# Altium PCB layout.PcbDoc (part 1 of 3)
Units mm, origin at the board's own origin, x right, y up, seen from the top; angles counter-clockwise.
Board outline 100.08 x 22.99 mm, 2 copper layers (Top Layer, Bottom Layer); 117 components, 109 nets, 394 pads, 168 vias.
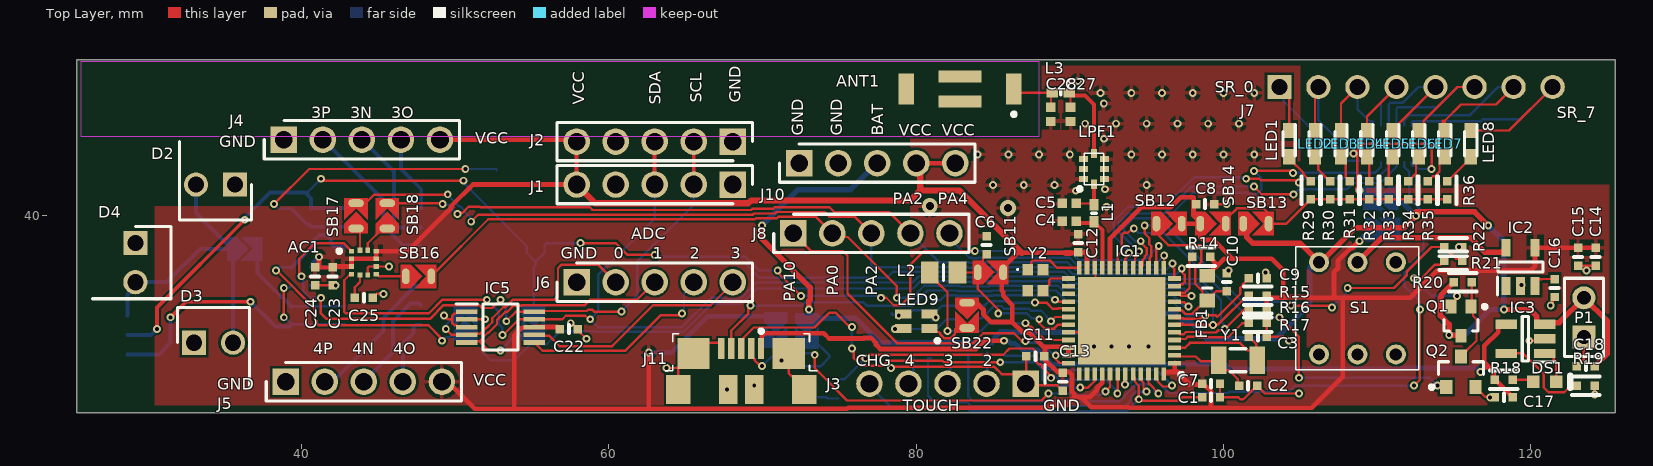
[diagram p0: Top Layer view]
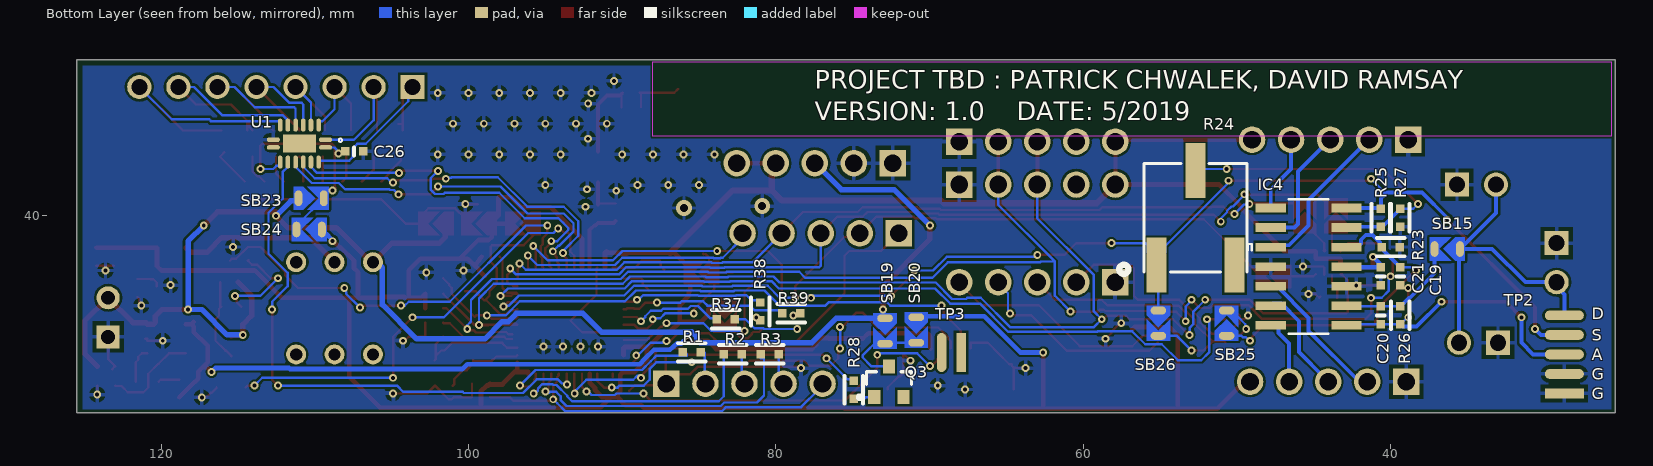
[diagram p1: Bottom Layer view, seen from below]
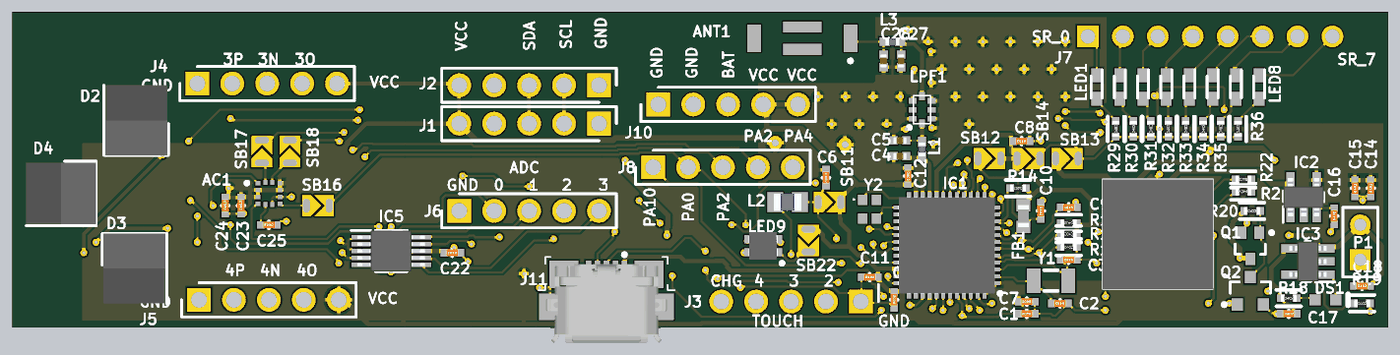
[diagram p3: 3D render of the assembled board from above, using the file's embedded part models]
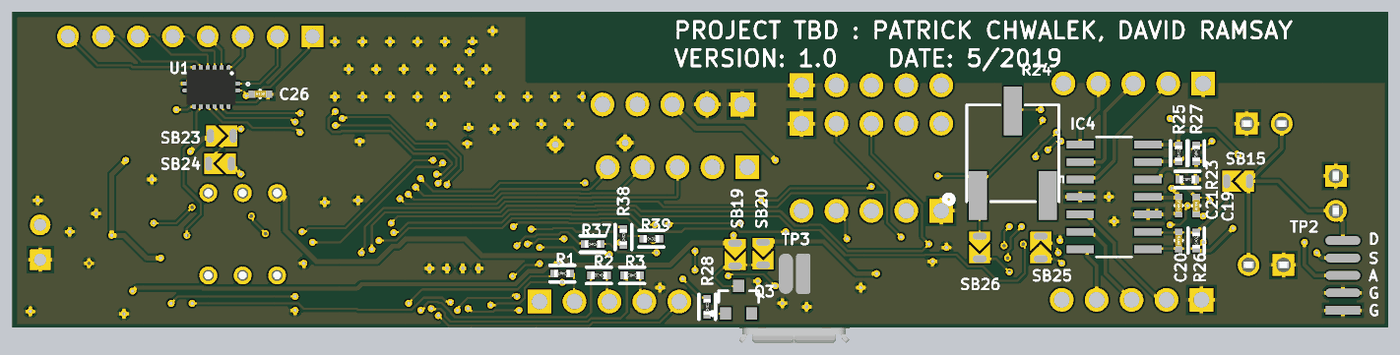
[diagram p4: 3D render of the assembled board from below, using the file's embedded part models]

## Layer stack, top to bottom
Top Solder: solder mask 0.0102, Solder Resist, Dk 3.5
Top Layer: signal copper 0.0356
Dielectric 1: dielectric 0.32, FR-4, Dk 4.8
Bottom Layer: signal copper 0.0356
Bottom Solder: solder mask 0.0102, Solder Resist, Dk 3.5

## Board outline
25.4,27.178 125.476,27.178 125.476,50.165 25.4,50.165

## Design rules (kind name [scope] priority, off if disabled: settings)
Clearance [All] p1: gap=0.152 ignorepadtopadclearanceinfootprint=FALSE
MinimumSolderMaskSliver [All] p1: minsoldermaskwidth=0.102
PolygonConnect [All] p1: connectstyle=Relief reliefconductorwidth=0.254 reliefentries=4 polygonreliefangle="90 Angle" airgapwidth=0.254
RoutingVias [All] p1: holewidth=0.254 width=0.508 viastyle="Through Hole" minholewidth=0.254 minwidth=0.508 maxholewidth=0.254 maxwidth=0.508
SilkToSilkClearance [All] p1: silktosilkclearance=0
SilkToSolderMaskClearance [IsPad] p1: minsilkscreentomaskgap=0 clearancetoexposedcopper=TRUE
SolderMaskExpansion [All] p1: expansion=0.102
Width RF [InNet('RF_OUT')] p1: maxlimit=0.254 minlimit=0.254 preferedwidth=0.254
Width VBAT [InNet('BAT_OUT')] p2: maxlimit=0.356 minlimit=0.254 preferedwidth=0.356 minimp=50.000000 maximp=50.000000 favimp=50.000000
Width VBAT_1 [InNet('BAT_SW')] p3: maxlimit=0.356 minlimit=0.254 preferedwidth=0.356 minimp=50.000000 maximp=50.000000 favimp=50.000000
Width 3.3V [InNet('VCC')] p4: maxlimit=0.457 minlimit=0.203 preferedwidth=0.305 minimp=50.000000 maximp=50.000000 favimp=50.000000
Width 5V [InNet('5V')] p5: maxlimit=0.305 minlimit=0.203 preferedwidth=0.305 minimp=50.000000 maximp=50.000000 favimp=50.000000
Width [All] p6: maxlimit=0.254 minlimit=0.152 preferedwidth=0.152 minimp=50.000000 maximp=50.000000 favimp=50.000000
27 further rules are at their usual default settings.

## Classes and differential pairs
component class Sheet1_ui: C26 LED1 LED2 LED3 LED4 LED5 LED6 LED7 LED8 LED9 Q3 R28 R29 R30 R31 R32 R33 R34 R35 R36 R37 R38 R39 SB19 SB20 SB22 SB23 SB24 TP3 U1
component class Sheet1_sensors: AC1 C19 C20 C21 C22 C23 C24 C25 D2 D3 D4 IC4 IC5 R23 R24 R25 R26 R27 SB15 SB16 SB17 SB18 SB25 SB26 TP2
component class Sheet1_pwr: C14 C15 C16 C17 C18 DS1 IC2 IC3 P1 Q1 Q2 R18 R19 R20 R21 R22 S1 SB13 SB14
component class Sheet1_mcu: ANT1 C2 C3 C4 C5 C6 C7 C8 C9 C10 C11 C12 C13 C27 C28 FB1 IC1 J11 L1 L2 L3 LPF1 R14 R15 R16 R17 SB11 SB12 Y1 Y2
component class Sheet1_headers: C1 J1 J2 J3 J4 J5 J6 J7 J8 J10 R1 R2 R3

## Components (designator, comment, footprint, x,y, rotation, side; value= is the part's Value field where it differs from the comment)
AC1 "LSM303CTR" PQFN50P200X200X100-12N 44.069,36.957 r0 top
ANT1 "2450AT43B100E" 2450AT43B100E 82.86,48.26 r0 top
C1 "0.1µF" SMD-0402C 99.187,28.194 r90 top
C2 "15pF" SMD-0402C 101.6,28.956 r90 top
C3 "15pF" SMD-0402C 102.235,32.131 r90 top
C4 "GRM1555C1HR80BA01D" CAPC1005X55N 89.964,39.666 r0 top
C5 "GRM1555C1HR30WA01D" CAPC1005X55N 89.964,40.809 r0 top
C6 "4.7µF" SMD-0402C 84.582,38.1 r180 top
C7 "0.10µF" SMD-0402C 99.187,29.083 r90 top
C8 "0.10µF" SMD-0402C 98.806,40.767 r90 top
C9 "0.10µF" SMD-0402C 102.235,35.941 r90 top
C10 "0.10µF" SMD-0402C 100.203,35.687 r180 top
C11 "0.10µF" SMD-0402C 87.757,30.861 r270 top
C12 "0.10µF" SMD-0402C 90.551,38.227 r180 top
C13 "100pF" SMD-0402C 89.535,29.21 r0 top
C14 "1µF" SMD-0402C 124.206,37.338 r0 top
C15 "10µF" SMD-0402C 123.063,37.338 r0 top
C16 "0.10µF" SMD-0402C 121.539,35.306 r0 top
C17 "4.7µF" SMD-0402C 118.237,28.194 r270 top
C18 "4.7µF" SMD-0402C 123.571,30.226 r270 top
C19 "10000pF" SMD-0402C 39.37,36.068 r0 bottom
C20 "5pF" SMD-0402C 40.64,33.528 r0 bottom
C21 "0.10µF" SMD-0402C 40.64,36.068 r180 bottom
C22 "0.10µF" SMD-0402C 57.404,32.639 r90 top
C23 "10µF" SMD-0402C 42.037,36.068 r0 top
C24 "0.10µF" SMD-0402C 40.894,36.068 r0 top
C25 "0.10µF" SMD-0402C 44.069,34.671 r90 top
C26 "1µF" SMD-0402C 107.442,44.196 r270 bottom
C27 "GRM1555C1HR80BA01D" CAPC1005X55N 90.043,46.609 r90 top
C28 "GRM1555C1HR30WA01D" CAPC1005X55N 88.773,46.609 r90 top
D2 "BPV22NF" TO254P510X450X920-2P 35.687,42.037 r180 top
D3 "BPV22NF" TO254P510X450X920-2P 33.02,31.75 r0 top
D4 "BPV22NF" TO254P510X450X920-2P 29.21,38.227 r270 top
DS1 "LTST-C190KFKT" LTST-C190KFKT_V 120.904,29.21 r0 top
FB1 "FCM1608KF-601T03" BEADC1608X95N 98.933,35.306 r90 top
IC1 "STM32WB55CGU6" QFN50P700X700X65-49N-D 93.366,33.175 r180 top
IC2 "LK112M33TR" SOT95P280X145-5N 119.319,36.683 r90 top
IC3 "MCP73831T-2DCI_OT" SOT95P270X145-5N 119.634,32.004 r180 top
IC4 "LM2902PWRG3" SOIC127P600X175-14N 45.339,36.703 r0 bottom
IC5 "ADS1015IDGST" SOP50P490X110-10N 52.959,32.766 r0 top
J1 "22-28-4050" HDRV5W66P0X254_1X5_1270X249X838P 68.072,42.037 r180 top
J2 "22-28-4050" HDRV5W66P0X254_1X5_1270X249X838P 68.072,44.831 r180 top
J3 "22-28-4050" HDRV5W66P0X254_1X5_1270X249X838P 87.122,29.083 r180 top
J4 "22-28-4050" HDRV5W66P0X254_1X5_1270X249X838P 38.862,44.958 r0 top
J5 "22-28-4050" HDRV5W66P0X254_1X5_1270X249X838P 38.989,29.21 r0 top
J6 "22-28-4050" HDRV5W66P0X254_1X5_1270X249X838P 57.912,35.687 r0 top
J7 "22-28-4083" HDRV8W87P0X254_1X8_2032X249X863P 103.632,48.387 r0 top
J8 "22-28-4050" HDRV5W66P0X254_1X5_1270X249X838P 72.009,38.862 r0 top
J10 "22-28-4050" HDRV5W66P0X254_1X5_1270X249X838P 72.39,43.434 r0 top
J11 "ZX62R-B-5P" HIRO-ZX62R-B-5P_V 68.619,30.04 r0 top
L1 "LQG15HS2N7S02D" INDC1005X55N 91.567,40.174 r90 top
L2 "LBR2012T100K" INDC2012X145N 81.788,36.322 r0 top
L3 "LQG15HS2N7S02D" INDC1005X55N 89.408,48.006 r180 top
LED1 "150060VS55040" LEDM168X50N 104.267,44.704 r270 top
LED2 "150060VS55040" LEDM168X50N 105.954,44.704 r270 top
LED3 "150060VS55040" LEDM168X50N 107.642,44.704 r270 top
LED4 "150060VS55040" LEDM168X50N 109.329,44.704 r270 top
LED5 "150060VS55040" LEDM168X50N 111.016,44.704 r270 top
LED6 "150060VS55040" LEDM168X50N 112.703,44.704 r270 top
LED7 "150060VS55040" LEDM168X50N 114.391,44.704 r270 top
LED8 "150060VS55040" LEDM168X50N 116.078,44.704 r270 top
LED9 "CLMVC-FKC-CGJJM569aBB7a343" SON95P200X200X100-4N 80.01,33.147 r180 top
LPF1 "LFL212G45TC1A007" LFL212G45TC1A007 91.567,43.053 r90 top
P1 "Header 2" HDR1X2 123.444,32.131 r90 top
Q1 "NTS4101PT1G" ONSC-SOT-323-3-419-04_V 115.443,33.147 r270 top
Q2 "BSS138LT3G" ONSC-SOT-23-3-318-08_V 115.443,29.861 r90 top
Q3 "MMBT3904LT1G" ONSC-SOT-23-3-318-08_V 72.644,29.21 r90 bottom
R1 "1k" SMD-0402-RES 85.471,31.115 r90 bottom
R2 "1k" SMD-0402-RES 82.804,30.988 r90 bottom
R3 "1k" SMD-0402-RES 80.391,30.988 r90 bottom
R14 "10k" SMD-0402-RES 98.552,37.338 r90 top
R15 "10k" SMD-0402-RES 102.235,33.99 r90 top
R16 "10k" SMD-0402-RES 102.235,34.798 r90 top
R17 "10K" SMD-0402-RES 102.235,33.043 r270 top
R18 "80.6k" SMD-0402-RES 118.237,29.337 r270 top
R19 "20k" SMD-0402-RES 123.571,28.956 r270 top
R20 "1M" SMD-0402-RES 115.57,35.687 r270 top
R21 "10k" SMD-0402-RES 114.935,37.084 r90 top
R22 "32.4k" SMD-0402-RES 114.935,37.973 r90 top
R23 "47k" SMD-0402-RES 40.005,37.973 r90 bottom
R24 "3361P-1-104GLF" 3361P_1 52.705,39.878 r180 bottom
R25 "47k" SMD-0402-RES 40.64,39.878 r180 bottom
R26 "100k" SMD-0402-RES 39.37,33.528 r180 bottom
R27 "3.3k" SMD-0402-RES 39.37,39.878 r0 bottom
R28 "1k" SMD-0402-RES 74.93,28.702 r180 bottom
R29 "150" SMD-0402-RES 105.664,41.656 r0 top
R30 "150" SMD-0402-RES 106.934,41.656 r0 top
R31 "150" SMD-0402-RES 108.204,41.656 r0 top
R32 "150" SMD-0402-RES 109.474,41.656 r0 top
R33 "150" SMD-0402-RES 110.744,41.656 r0 top
R34 "150" SMD-0402-RES 112.014,41.656 r0 top
R35 "150" SMD-0402-RES 113.284,41.656 r0 top
R36 "150" SMD-0402-RES 114.554,41.656 r0 top
R37 "100" SMD-0402-RES 83.261,33.274 r270 bottom
R38 "22" SMD-0402-RES 81.026,33.782 r180 bottom
R39 "22" SMD-0402-RES 78.994,33.655 r270 bottom
S1 "MHPS2285" MHPS2285 111.212,36.988 r180 top
SB11 "SOLDER_JUMPER" JUMPER_SMD 85.09,36.322 r0 top
SB12 "SOLDER_JUMPER" JUMPER_SMD 96.71,39.497 r0 top
SB13 "SOLDER_JUMPER" JUMPER_SMD 102.362,39.497 r0 top
SB14 "SOLDER_JUMPER" JUMPER_SMD 99.568,39.497 r0 top
SB15 "SOLDER_JUMPER" JUMPER_SMD 36.576,37.846 r0 bottom
SB16 "SOLDER_JUMPER" JUMPER_SMD 47.879,36.068 r0 top
SB17 "SOLDER_JUMPER" JUMPER_SMD 43.561,40.259 r90 top
SB18 "SOLDER_JUMPER" JUMPER_SMD 45.593,40.259 r90 top
SB19 "SOLDER_JUMPER" JUMPER_SMD 72.898,32.258 r270 bottom
SB20 "SOLDER_JUMPER" JUMPER_SMD 70.866,32.322 r270 bottom
SB22 "SOLDER_JUMPER" JUMPER_SMD 83.312,33.274 r270 top
SB23 "SOLDER_JUMPER" JUMPER_SMD 109.982,41.148 r180 bottom
SB24 "SOLDER_JUMPER" JUMPER_SMD 110.617,39.116 r0 bottom
SB25 "SOLDER_JUMPER" JUMPER_SMD 50.673,33.274 r90 bottom
SB26 "SOLDER_JUMPER" JUMPER_SMD 55.118,32.766 r270 bottom
TP2 "TEST_PT" "Edge Connector (5)" 28.702,28.448 r90 bottom
TP3 "2_pin_pad" "Edge Connector (2-mini)" 67.945,31.115 r0 bottom
U1 "74HC595BQ,115" QFN50P250X350X100-17N 110.998,44.704 r0 bottom
Y1 "NX3215SA-32.768K-STD-MUA-8" NX3215SA 100.945,30.607 r0 top
Y2 "XRCGB32M000F1H01R0" XRCGB32M000F1H01R0 87.757,35.814 r270 top

## Footprints (in the part's own frame and the unit in brackets; to place one, negate y for a bottom-side part, rotate by r counter-clockwise, add the part's x,y. Pads: shape width x height; smd on the part's side, far side on the other; paste and mask are expansions set on the pad)
2450AT43B100E [mm]
  rect 1x2 smd mask+0.102: 1(3.5,0) 2(-3.5,0)
  rect 2.8x0.8 smd mask+0.102: 3(0,0.815) 4(0,-0.815)
  silkscreen extent 3.4,-1.75 3.6,-1.55
3361P_1 [mm]
  rect 1.31x3.55 smd: 1(-2.54,-3.075) 2(0,3.075) 3(2.54,-3.075)
  silkscreen extent -4.96,-3.65 3.35,3.52
BEADC1608X95N [mm]
  rect 0.9x1 smd: 1(-0.8,0) 2(0.8,0)
  silkscreen extent 0,-0.3 0,0.3, body extent -0.8,-0.4 0.8,0.4, height 0.95
CAPC1005X55N [mm]
  rect 0.6x0.62 smd: 1(-0.46,0) 2(0.46,0)
  body extent -0.5,-0.25 0.5,0.25, height 0.55
"Edge Connector (2-mini)" [mm]
  rect 0.635x2.54 smd paste+0.2: 1(0,0)
  oval 0.635x2.54 smd paste+0.2: 2(1.27,0)
"Edge Connector (5)" [mm]
  rect 0.635x2.54 smd: 1(0,0)
  oval 0.635x2.54 smd: 2(1.27,0) 3(2.54,0) 4(3.81,0) 5(5.08,0)
HDR1X2 [mm] "Connector; Header; 2 Position"
  rect 1.5x1.5 hole 0.9: 1(0,0)
  round 1.5 hole 0.9: 2(2.54,0)
  silkscreen extent -1.27,-1.27 3.81,1.27
HDRV5W66P0X254_1X5_1270X249X838P [mm]
  rect 1.725x1.725 hole 1.15: 1(0,0)
  round 1.725 hole 1.15: 2(2.54,0) 3(5.08,0) 4(7.62,0) 5(10.16,0)
  silkscreen extent -1.27,-1.25 11.43,1.25
HDRV8W87P0X254_1X8_2032X249X863P [mm]
  rect 1.575x1.575 hole 1.05: 1(0,0)
  round 1.575 hole 1.05: 2(2.54,0) 3(5.08,0) 4(7.62,0) 5(10.16,0) 6(12.7,0) 7(15.24,0) 8(17.78,0)
HIRO-ZX62R-B-5P_V [mm] "USB Micro-B R/A Connector"
  rect 0.4x1.35 smd: 1(1.3,1.338) 2(0.65,1.338) 3(0,1.338) 4(-0.65,1.338) 5(-1.3,1.338)
  rect 2.1x2 smd: 6(-3.1,1.013) 11(3.1,1.013)
  rect 1.6x1.9 smd: 7(-4.1,-1.338) 10(4.1,-1.338)
  rect 1.2x1.9 smd: 8(-0.85,-1.338) 9(0.85,-1.338)
  silkscreen extent -4.95,-0.13 4.95,2.58, body extent -4.4,-3.95 4.4,1.78, height 2.71
INDC1005X55N [mm]
  rect 0.75x0.6 smd: 1(-0.55,0) 2(0.55,0)
  silkscreen extent 0,-0.15 0,0.15, body extent -0.5,-0.25 0.5,0.25, height 0.55
INDC2012X145N [mm]
  rect 1.15x1.45 smd: 1(-0.9,0) 2(0.9,0)
  silkscreen extent 0,-0.53 0,0.53, body extent -1,-0.63 1,0.63, height 1.45
JUMPER_SMD [mil]
  oval 20x40 smd paste+0 mask+0: 1(-42.5,0) 2(22.5,0)
  Top Layer region: -55,30 -55,-30 -30,-30 0,0 -30,30
  Top Layer region: -20,30 10,0 -20,-30 35,-30 35,30
LEDM168X50N [mm]
  rect 1x0.8 smd: 1(-0.85,0) 2(0.85,0)
  silkscreen extent -1.25,-0.4 0.8,0.4
LFL212G45TC1A007 [mm]
  rect 0.4x0.6 smd: 1(-0.65,0.685) 2(0,0.685) 3(0.65,0.685) 5(0.65,-0.685) 6(0,-0.685) 7(-0.65,-0.685)
  rect 0.6x0.4 smd: 4(1,0) 8(-1,0)
  silkscreen extent -1.42,-0.64 1.02,1.05
LTST-C190KFKT_V [mm] "SMD, 2-Leads, Body 1.6x0.8mm"
  rect 0.8x0.8 smd: 1(-0.75,0) 2(0.75,0)
  silkscreen extent 1.65,-0.4 1.65,0.4, body extent -0.8,-0.4 0.8,0.4, height 0.9
MHPS2285 [mm]
  round 1.3 hole 0.8: 1(0,0) 2(2.5,0) 3(5,0) 4(5,6) 5(2.5,6) 6(0,6)
  silkscreen extent -1.5,-1 6.5,7, body extent -1.5,-1 6.5,7, height 13.5
NX3215SA [mm]
  rect 1x1.8 smd: 1(-1.25,0) 2(1.25,0)
  silkscreen extent -0.5,-0.75 0.5,0.75
ONSC-SOT-23-3-318-08_V [mm] "SOT23, 3-Leads, Body 2.92x1.3mm, Pitch 0.95mm"
  rect 0.9x0.8 smd: 1(-1,0.95) 2(-1,-0.95) 3(1,0)
  silkscreen extent -1.12,-1.46 0.65,2.02, body extent -0.65,-1.46 0.65,1.46, height 1.11
ONSC-SOT-323-3-419-04_V [mm] "SOT23, 3-Leads, Body 2x1.25mm, Pitch 0.65mm"
  rect 0.9x0.7 smd: 1(-0.95,0.65) 2(-0.95,-0.65) 3(0.95,0)
  silkscreen extent -1.07,-1.1 0.62,1.68, body extent -0.63,-1 0.63,1, height 1
PQFN50P200X200X100-12N [mm]
  rect 0.35x0.3 smd: 1(-0.8,0.75) 2(-0.8,0.25) 3(-0.8,-0.25) 4(-0.8,-0.75) 7(0.8,-0.75) 8(0.8,-0.25) 9(0.8,0.25) 10(0.8,0.75)
  rect 0.3x0.35 smd: 5(-0.25,-0.8) 6(0.25,-0.8) 11(0.25,0.8) 12(-0.25,0.8)
  silkscreen extent -1.72,0.63 -1.47,0.87
QFN50P250X350X100-17N [mm]
  oval 0.85x0.3 smd: 1(-1.7,-0.25) 8(1.7,-0.25) 9(1.7,0.25) 16(-1.7,0.25)
  oval 0.3x0.85 smd: 2(-1.25,-1.2) 3(-0.75,-1.2) 4(-0.25,-1.2) 5(0.25,-1.2) 6(0.75,-1.2) 7(1.25,-1.2) 10(1.25,1.2) 11(0.75,1.2) 12(0.25,1.2) 13(-0.25,1.2) 14(-0.75,1.2) 15(-1.25,1.2)
  rect 2.15x1.15 smd: 17(0,0)
  silkscreen extent -2.78,-0.33 -2.56,-0.11, body extent -1.81,-1.31 1.81,1.31, height 1
QFN50P700X700X65-49N-D [mm]
  rect 0.85x0.3 smd: 1(-3.45,2.75) 2(-3.45,2.25) 3(-3.45,1.75) 4(-3.45,1.25) 5(-3.45,0.75) 6(-3.45,0.25) 7(-3.45,-0.25) 8(-3.45,-0.75) 9(-3.45,-1.25) 10(-3.45,-1.75) 11(-3.45,-2.25) 12(-3.45,-2.75) 25(3.45,-2.75) 26(3.45,-2.25) 27(3.45,-1.75) 28(3.45,-1.25) 29(3.45,-0.75) 30(3.45,-0.25) 31(3.45,0.25) 32(3.45,0.75) 33(3.45,1.25) 34(3.45,1.75) 35(3.45,2.25) 36(3.45,2.75)
  rect 0.3x0.85 smd: 13(-2.75,-3.45) 14(-2.25,-3.45) 15(-1.75,-3.45) 16(-1.25,-3.45) 17(-0.75,-3.45) 18(-0.25,-3.45) 19(0.25,-3.45) 20(0.75,-3.45) 21(1.25,-3.45) 22(1.75,-3.45) 23(2.25,-3.45) 24(2.75,-3.45) 37(2.75,3.45) 38(2.25,3.45) 39(1.75,3.45) 40(1.25,3.45) 41(0.75,3.45) 42(0.25,3.45) 43(-0.25,3.45) 44(-0.75,3.45) 45(-1.25,3.45) 46(-1.75,3.45) 47(-2.25,3.45) 48(-2.75,3.45)
  rect 5.7x5.7 smd: 49(0,0)
  silkscreen extent -4,3.38 -3.75,3.62, body extent -3.55,-3.55 3.55,3.55, height 0.65
SMD-0402-RES [mm]
  rect 0.55x0.55 smd: 1(0,0.584) 2(0,-0.584)
  silkscreen extent -0.6,-0.9 0.6,0.9, body extent -0.27,-0.57 0.28,0.58, height 0.41
SMD-0402C [mm]
  rect 0.55x0.55 smd: 1(0,0.584) 2(0,-0.584)
  silkscreen extent -0.25,0 0.25,0, body extent -0.25,-0.51 0.25,0.51, height 0.51
SOIC127P600X175-14N [mil]
  rect 78x22 smd: 1(-97,150) 2(-97,100) 3(-97,50) 4(-97,0) 5(-97,-50) 6(-97,-100) 7(-97,-150) 8(97,-150) 9(97,-100) 10(97,-50) 11(97,0) 12(97,50) 13(97,100) 14(97,150)
  silkscreen extent -51,-172 156,172
SON95P200X200X100-4N [mm]
  rect 1.05x0.6 smd: 1(-0.85,0.475) 2(-0.85,-0.475) 3(0.85,-0.475) 4(0.85,0.475)
  silkscreen extent -1.5,1.15 -1.25,1.4, body extent -1.05,-1 1.05,1, height 1
SOP50P490X110-10N [mm]
  rect 1.4x0.3 smd: 1(-2.2,1) 2(-2.2,0.5) 3(-2.2,0) 4(-2.2,-0.5) 5(-2.2,-1) 6(2.2,-1) 7(2.2,-0.5) 8(2.2,0) 9(2.2,0.5) 10(2.2,1)
  silkscreen extent -2.9,-1.5 1.15,1.5, body extent -2.45,-1.5 2.45,1.5, height 1.1
SOT95P270X145-5N [mm]
  rect 1.4x0.6 smd: 1(-1.25,0.95) 2(-1.25,0) 3(-1.25,-0.95) 4(1.25,-0.95) 5(1.25,0.95)
  silkscreen extent -1.95,-1.45 0.2,1.5, body extent -1.35,-1.45 1.35,1.45, height 1.45
SOT95P280X145-5N [mm]
  rect 1.15x0.6 smd: 1(-1.25,0.95) 2(-1.25,0) 3(-1.25,-0.95) 4(1.25,-0.95) 5(1.25,0.95)
  silkscreen extent -1.83,-1.48 0.33,1.5, body extent -1.4,-1.48 1.4,1.48, height 1.45
TO254P510X450X920-2P [mm]
  rect 1.575x1.575 hole 1.05: 1(0,0)
  round 1.575 hole 1.05: 2(2.54,0)
  silkscreen extent -1.08,-2.8 3.62,2.3, body extent -0.98,-2.8 3.52,2.3, height 8.6
XRCGB32M000F1H01R0 [mm]
  rect 0.75x0.7 smd: 1(-0.675,-0.5) 2(0.675,-0.5) 3(0.675,0.5) 4(-0.675,0.5)
  silkscreen extent -0.75,-1.2 -0.65,-1.1

## Part data
AC1: "Accelerometer", Manufacturer_Name=STMicroelectronics, Mouser Part Number=511-LSM303CTR, RS Part Number=1106551P, Datasheet Link=http://www.st.com/st-web-ui/static/active/en/resource/technical/document/datasheet/DM00089896.pdf, Height=1mm, Manufacturer_Part_Number=LSM303CTR, Mouser Price/Stock=https://www.mouser.com/Search/Refine.aspx?Keyword=511-LSM303CTR, RS Price/Stock=http://uk.rs-online.com/web/p/products/1106551P
C1: library part GRJ155R60J106ME11D, "CAP CER 0.1UF 6.3V X5R 0402", Digi-Key Part Number=490-13211-1-ND, Manufacturer="Murata Electronics North America", Operating Temperature="-55°C ~ 85°C", Package / Case="0402 (1005 Metric)", Ratings=-, Temperature Coefficient=X5R, Tolerance=±20%, Voltage=6.3V, @ qty=0, Applications="Boardflex Sensitive", Datasheets=http://psearch.en.murata.com/capacitor/product/GRJ155R60J106ME11%23.pdf, Factory Stock=0, Features="Derating Recommended, Soft Termination", Height - Seated (Max)=-, Image=//media.digikey.com/Renders/Murata%20Renders/ZRB-SERIES-0402.jpg, Lead Spacing=-, Lead Style=-, Minimum Quantity=1, Mounting Type="Surface Mount, MLCC", Packaging="Cut Tape (CT)", Part Number=GRJ155R60J106ME11D, Part Status=Active, Quantity Available=64064, Series=GRJ, Size / Dimension="0.039\" L x 0.020\" W (1.00mm x 0.50mm)", Thickness (Max)="0.028\" (0.70mm)", Unit Price (USD)=0.23
C2 C3: library part GCM1555C1H150JA16D, "CAP CER 15PF 50V NP0 0402", Digi-Key Part Number=490-11147-1-ND, Manufacturer="Murata Electronics North America", Operating Temperature="-55°C ~ 125°C", Package / Case="0402 (1005 Metric)", Ratings=AEC-Q200, Temperature Coefficient="C0G, NP0", Tolerance=±5%, Voltage=50V, @ qty=0, Applications=Automotive, Datasheets=http://www.murata.com/~/media/webrenewal/support/library/catalog/products/capacitor/mlcc/c03e.ashx, Factory Stock=0, Features=-, Height - Seated (Max)=-, Image=//media.digikey.com/Renders/Murata%20Renders/ZRB-SERIES-0402.jpg, Lead Spacing=-, Lead Style=-, Minimum Quantity=1, Mounting Type="Surface Mount, MLCC", Packaging="Cut Tape (CT)", Part Number=GCM1555C1H150JA16D, Part Status=Active, Quantity Available=6185, Series=GCM, Size / Dimension="0.039\" L x 0.020\" W (1.00mm x 0.50mm)", Thickness (Max)="0.022\" (0.55mm)", Unit Price (USD)=0.1
C4 C27: "Capacitor", Manufacturer_Name="Murata Electronics", Mouser Part Number=81-GRM1555C1HR80BA1D, RS Part Number=8145426P, Datasheet Link=http://www.murata.com/~/media/webrenewal/support/library/catalog/products/capacitor/mlcc/c02e.pdf, Height=0.55mm, Manufacturer_Part_Number=GRM1555C1HR80BA01D, Mouser Price/Stock=https://www.mouser.com/Search/Refine.aspx?Keyword=81-GRM1555C1HR80BA1D, RS Price/Stock=http://uk.rs-online.com/web/p/products/8145426P
C5 C28: "Capacitor", Manufacturer_Name="Murata Electronics", Mouser Part Number=81-GRM1555C1HR30WA1D, RS Part Number=8145394P, Datasheet Link=http://www.murata.com/~/media/webrenewal/support/library/catalog/products/capacitor/mlcc/c02e.pdf, Height=0.55mm, Manufacturer_Part_Number=GRM1555C1HR30WA01D, Mouser Price/Stock=https://www.mouser.com/Search/Refine.aspx?Keyword=81-GRM1555C1HR30WA1D, RS Price/Stock=http://uk.rs-online.com/web/p/products/8145394P
C6 C17 C18: library part GRM153R60G475ME15D, "CAP CER 4.7UF 4V X5R 0402", Digi-Key Part Number=490-13231-1-ND, Manufacturer="Murata Electronics North America", Operating Temperature="-55°C ~ 85°C", Package / Case="0402 (1005 Metric)", Ratings=-, Temperature Coefficient=X5R, Tolerance=±20%, Voltage=4V, @ qty=0, Applications="General Purpose", Datasheets=http://psearch.en.murata.com/capacitor/product/GRM153R60G475ME15%23.pdf, Factory Stock=0, Features=-, Height - Seated (Max)=-, Image=//media.digikey.com/Renders/Murata%20Renders/ZRB-SERIES-0402.jpg, Lead Spacing=-, Lead Style=-, Minimum Quantity=1, Mounting Type="Surface Mount, MLCC", Packaging="Cut Tape (CT)", Part Number=GRM153R60G475ME15D, Part Status=Active, Quantity Available=9100, Series=GRM, Size / Dimension="0.039\" L x 0.020\" W (1.00mm x 0.50mm)", Thickness (Max)="0.013\" (0.33mm)", Unit Price (USD)=0.27
C7 C8 C9 C10 C11 C12 C16 C21 C22 C24 C25: library part GCM155R71C104KA55D, "CAP CER 0.1UF 16V X7R 0402", Digi-Key Part Number=490-4759-1-ND, Manufacturer="Murata Electronics North America", Operating Temperature="-55°C ~ 125°C", Package / Case="0402 (1005 Metric)", Ratings=AEC-Q200, Temperature Coefficient=X7R, Tolerance=±10%, Voltage=16V, @ qty=0, Applications=Automotive, Datasheets=http://www.murata.com/~/media/webrenewal/support/library/catalog/products/capacitor/mlcc/c03e.ashx, Factory Stock=0, Features=-, Height - Seated (Max)=-, Image=//media.digikey.com/Renders/Murata%20Renders/ZRB-SERIES-0402.jpg, Lead Spacing=-, Lead Style=-, Minimum Quantity=1, Mounting Type="Surface Mount, MLCC", Packaging="Cut Tape (CT)", Part Number=GCM155R71C104KA55D, Part Status=Active, Quantity Available=734194, Series=GCM, Size / Dimension="0.039\" L x 0.020\" W (1.00mm x 0.50mm)", Thickness (Max)="0.022\" (0.55mm)", Unit Price (USD)=0.1
C13: library part GCM1555C1H101JA16D, "CAP CER 100PF 50V NP0 0402", Digi-Key Part Number=490-10669-1-ND, Manufacturer="Murata Electronics North America", Operating Temperature="-55°C ~ 125°C", Package / Case="0402 (1005 Metric)", Ratings=AEC-Q200, Temperature Coefficient="C0G, NP0", Tolerance=±5%, Voltage=50V, @ qty=0, Applications=Automotive, Datasheets=http://www.murata.com/~/media/webrenewal/support/library/catalog/products/capacitor/mlcc/c03e.ashx, Factory Stock=0, Features=-, Height - Seated (Max)=-, Image=//media.digikey.com/Renders/Murata%20Renders/ZRB-SERIES-0402.jpg, Lead Spacing=-, Lead Style=-, Minimum Quantity=1, Mounting Type="Surface Mount, MLCC", Packaging="Cut Tape (CT)", Part Number=GCM1555C1H101JA16D, Part Status=Active, Quantity Available=61397, Series=GCM, Size / Dimension="0.039\" L x 0.020\" W (1.00mm x 0.50mm)", Thickness (Max)="0.022\" (0.55mm)", Unit Price (USD)=0.1
C14 C26: library part GCM155C71A105KE38D, "CAP CER 1UF 10V X7S 0402", Digi-Key Part Number=490-13409-1-ND, Manufacturer="Murata Electronics North America", Operating Temperature="-55°C ~ 125°C", Package / Case="0402 (1005 Metric)", Ratings=AEC-Q200, Temperature Coefficient=X7S, Tolerance=±10%, Voltage=10V, @ qty=0, Applications=Automotive, Datasheets=http://www.murata.com/~/media/webrenewal/support/library/catalog/products/capacitor/mlcc/c03e.ashx, Factory Stock=0, Features=-, Height - Seated (Max)=-, Image=//media.digikey.com/Renders/Murata%20Renders/ZRB-SERIES-0402.jpg, Lead Spacing=-, Lead Style=-, Minimum Quantity=1, Mounting Type="Surface Mount, MLCC", Packaging="Cut Tape (CT)", Part Number=GCM155C71A105KE38D, Part Status=Active, Quantity Available=7240, Series=GCM, Size / Dimension="0.039\" L x 0.020\" W (1.00mm x 0.50mm)", Thickness (Max)="0.022\" (0.55mm)", Unit Price (USD)=0.12
C15 C23: library part GRJ155R60J106ME11D, "CAP CER 10UF 6.3V X5R 0402", Digi-Key Part Number=490-13211-1-ND, Manufacturer="Murata Electronics North America", Operating Temperature="-55°C ~ 85°C", Package / Case="0402 (1005 Metric)", Ratings=-, Temperature Coefficient=X5R, Tolerance=±20%, Voltage=6.3V, @ qty=0, Applications="Boardflex Sensitive", Datasheets=http://psearch.en.murata.com/capacitor/product/GRJ155R60J106ME11%23.pdf, Factory Stock=0, Features="Derating Recommended, Soft Termination", Height - Seated (Max)=-, Image=//media.digikey.com/Renders/Murata%20Renders/ZRB-SERIES-0402.jpg, Lead Spacing=-, Lead Style=-, Minimum Quantity=1, Mounting Type="Surface Mount, MLCC", Packaging="Cut Tape (CT)", Part Number=GRJ155R60J106ME11D, Part Status=Active, Quantity Available=64064, Series=GRJ, Size / Dimension="0.039\" L x 0.020\" W (1.00mm x 0.50mm)", Thickness (Max)="0.028\" (0.70mm)", Unit Price (USD)=0.23
C19: library part GCM155R71H103KA55D, "CAP CER 10000PF 50V X7R 0402", Digi-Key Part Number=490-4762-1-ND, Manufacturer="Murata Electronics North America", Operating Temperature="-55°C ~ 125°C", Package / Case="0402 (1005 Metric)", Ratings=AEC-Q200, Temperature Coefficient=X7R, Tolerance=±10%, Voltage=50V, @ qty=0, Applications=Automotive, Datasheets=http://www.murata.com/~/media/webrenewal/support/library/catalog/products/capacitor/mlcc/c03e.ashx, Factory Stock=0, Features=-, Height - Seated (Max)=-, Image=//media.digikey.com/Renders/Murata%20Renders/ZRB-SERIES-0402.jpg, Lead Spacing=-, Lead Style=-, Minimum Quantity=1, Mounting Type="Surface Mount, MLCC", Packaging="Cut Tape (CT)", Part Number=GCM155R71H103KA55D, Part Status=Active, Quantity Available=650067, Series=GCM, Size / Dimension="0.039\" L x 0.020\" W (1.00mm x 0.50mm)", Thickness (Max)="0.022\" (0.55mm)", Unit Price (USD)=0.1
C20: library part GJM1555C1H5R0BB01D, "CAP CER 5PF 50V NP0 0402", Digi-Key Part Number=490-8103-1-ND, Manufacturer="Murata Electronics North America", Operating Temperature="-55°C ~ 125°C", Package / Case="0402 (1005 Metric)", Ratings=-, Temperature Coefficient="C0G, NP0", Tolerance=±0.1pF, Voltage=50V, @ qty=0, Applications="RF, Microwave, High Frequency", Datasheets=http://www.murata.com/~/media/webrenewal/support/library/catalog/products/capacitor/mlcc/c02e.pdf, Factory Stock=0, Features="High Q, Low Loss", Height - Seated (Max)=-, Image=//media.digikey.com/Renders/Murata%20Renders/ZRB-SERIES-0402.jpg, Lead Spacing=-, Lead Style=-, Minimum Quantity=1, Mounting Type="Surface Mount, MLCC", Packaging="Cut Tape (CT)", Part Number=GJM1555C1H5R0BB01D, Part Status=Active, Quantity Available=17055, Series=GJM, Size / Dimension="0.039\" L x 0.020\" W (1.00mm x 0.50mm)", Thickness (Max)="0.022\" (0.55mm)", Unit Price (USD)=0.2
D2 D3 D4: "Diode", Manufacturer_Name=Vishay, Mouser Part Number=782-BPV22NF, RS Part Number=6997604P, Allied_Number=R1086877, Allied Price/Stock=https://www.alliedelec.com/vishay-dale-bpv22nf/R1086877/, Datasheet Link=http://www.vishay.com/docs/81509/bpv22nf.pdf, Height=5.1mm, Manufacturer_Part_Number=BPV22NF, Mouser Price/Stock=https://www.mouser.com/Search/Refine.aspx?Keyword=782-BPV22NF, RS Price/Stock=http://uk.rs-online.com/web/p/products/6997604P
DS1: library part CMP-1674-00008-1, "LED Uni-Color Orange, 75 mW, 30 mA, -35 to 85 degC, 2-Pin SMD, RoHS, Tape and Reel", Case\Package=0603, Case Code (Metric)=1608, Max Operating Temperature="155 degC", Min Operating Temperature="-55 degC", Package Quantity=5000, Power Rating="100 mW", Resistance="47 kohm", Tolerance=1%, Voltage Rating="50 V", Case Code (Imperial)=0603, ComponentLink1Description="Manufacturer URL", ComponentLink1URL=http://www.us.liteon.com/, ComponentLink2Description=Datasheet, ComponentLink2URL=http://optoelectronics.liteon.com/upload/download/DS-22-99-0186/S_110_LTST-C190KFKT.pdf, DatasheetVersion="Rev. I, 09/2011", Height="0.45 mm", Length="1.6 mm", Mount="Surface Mount", PackageDescription="2-Pin Surface Mount Device, Body 1.6 x 0.8 mm", PackageReference=C190KFKT, Packaging="Tape and Reel", Pins=2, REACH SVHC="No SVHC", RoHSCompliant=true, Voltage Rating (DC)="50 V", Width="0.8 mm"
FB1: "Ferrite Bead", Manufacturer_Name=TAI-TECH, Datasheet Link=https://www.tai-tech.com.tw/_upload/files/FCM1608-Series.pdf, Height=0.95mm, Manufacturer_Part_Number=FCM1608KF-601T03
IC1: "Integrated Circuit", Manufacturer_Name=STMicroelectronics, Mouser Part Number=511-STM32WB55CGU6, Datasheet Link=https://www.st.com/en/microcontrollers/stm32wb55cg.html, Height=0.65mm, Manufacturer_Part_Number=STM32WB55CGU6, Mouser Price/Stock=https://www.mouser.com/Search/Refine.aspx?Keyword=511-STM32WB55CGU6
IC2: "Integrated Circuit", Manufacturer_Name=STMicroelectronics, Mouser Part Number=511-LK112M33, RS Part Number=6869013P, Allied_Number=70407288, Allied Price/Stock=http://www.alliedelec.com/stmicroelectronics-lk112m33tr/70407288/, Datasheet Link=http://www.st.com/st-web-ui/static/active/en/resource/technical/document/datasheet/CD00002190.pdf, Height=1.45mm, Manufacturer_Part_Number=LK112M33TR, Mouser Price/Stock=https://www.mouser.com/Search/Refine.aspx?Keyword=511-LK112M33, RS Price/Stock=http://uk.rs-online.com/web/p/products/6869013P
IC3: "Integrated Circuit", Manufacturer_Name=Microchip, Manufacturer_Part_Number=MCP73831T-2DCI/OT, Mouser Part Number=579-MCP73831T-2DCIOT, RS Part Number=7240599P, Allied_Number=70414854, Allied Price/Stock=http://www.alliedelec.com/microchip-technology-inc-mcp73831t-2dci-ot/70414854/, Datasheet Link=http://ww1.microchip.com/downloads/en/DeviceDoc/20001984g.pdf, Height=1.45mm, Mouser Price/Stock=https://www.mouser.com/Search/Refine.aspx?Keyword=579-MCP73831T-2DCIOT, RS Price/Stock=http://uk.rs-online.com/web/p/products/7240599P
IC4: "Integrated Circuit", Manufacturer_Name="Texas Instruments", Mouser Part Number=595-LM2902PWRG3, Datasheet Link=http://www.ti.com/lit/gpn/lm2902, Manufacturer_Part_Number=LM2902PWRG3, Mouser Price/Stock=https://www.mouser.com/Search/Refine.aspx?Keyword=595-LM2902PWRG3
IC5: "Integrated Circuit", Manufacturer_Name="Texas Instruments", Mouser Part Number=595-ADS1015IDGST, RS Part Number=7094550P, Datasheet Link=http://docs-emea.rs-online.com/webdocs/0e31/0900766b80e31f2d.pdf, Height=1.1mm, Manufacturer_Part_Number=ADS1015IDGST, Mouser Price/Stock=https://www.mouser.com/Search/Refine.aspx?Keyword=595-ADS1015IDGST, RS Price/Stock=http://uk.rs-online.com/web/p/products/7094550P
J1 J2 J3 J4 J5 J6 J8 J10: "Connector", Manufacturer_Name=Molex, Mouser Part Number=538-22-28-4050, Allied_Number=70091194, Allied Price/Stock=http://www.alliedelec.com/molex-incorporated-22-28-4050/70091194/, Datasheet Link=http://www.mouser.com/ds/2/276/0022284050_PCB_HEADERS-228092.pdf, Height=8.38mm, Manufacturer_Part_Number=22-28-4050, Mouser Price/Stock=https://www.mouser.com/Search/Refine.aspx?Keyword=538-22-28-4050
J7: "Connector", Manufacturer_Name=Molex, Mouser Part Number=538-22-28-4083, Allied_Number=E5291758, Allied Price/Stock=https://www.alliedelec.com/molex-incorporated-22-28-4083/E5291758/, Datasheet Link=https://componentsearchengine.com/Datasheets/1/22-28-4083.pdf, Height=8.63mm, Manufacturer_Part_Number=22-28-4083, Mouser Price/Stock=https://www.mouser.com/Search/Refine.aspx?Keyword=538-22-28-4083
J11: library part CMP-0031-00001-1, "Connector; USBMicro-B,Reverse type, SMT; 5 Position; Right Angle", Operating Temperature="-30 to 85 degC", ComponentLink1Description="Manufacturer URL", ComponentLink1URL=http://www.hirose.com/‎, ComponentLink2Description=Datasheet, ComponentLink2URL=http://www.hirose.co.jp/cataloge_hp/e24200011.pdf, DatasheetVersion=08/2010, Mounting Technology="Surface Mount", PackageDescription="5-Pin USB Micro-B R/A Connector", PackageReference=ZX62R-B-5P, PartNumber=ZX62R-B-5P
L1 L3: "Inductor", Manufacturer_Name="Murata Electronics", Datasheet Link=https://www.arrow.com/en/products/lqg15hs2n7s02d/murata-manufacturing, Height=0.55mm, Manufacturer_Part_Number=LQG15HS2N7S02D
L2: "Inductor", Manufacturer_Name="TAIYO YUDEN", Mouser Part Number=963-LBR2012T100K, Datasheet Link=https://componentsearchengine.com/Datasheets/2/LBR2012T100K.pdf, Height=1.45mm, Manufacturer_Part_Number=LBR2012T100K, Mouser Price/Stock=https://www.mouser.com/Search/Refine.aspx?Keyword=963-LBR2012T100K
LED1 LED2 LED3 LED4 LED5 LED6 LED7 LED8: "LED", Manufacturer_Name="Wurth Elektronik", Mouser Part Number=710-150060VS55040, RS Part Number=1766157P, Datasheet Link=https://katalog.we-online.com/led/datasheet/150060VS55040.pdf, Height=0.5mm, Manufacturer_Part_Number=150060VS55040, Mouser Price/Stock=https://www.mouser.com/Search/Refine.aspx?Keyword=710-150060VS55040, RS Price/Stock=http://uk.rs-online.com/web/p/products/1766157P
LED9: "LED", Manufacturer_Name=Cree, Mouser Part Number=941-CLMVG569ABB7A343, Datasheet Link=https://componentsearchengine.com/Datasheets/1/CLMVC-FKC-CGJJM569aBB7a343.pdf, Height=1mm, Manufacturer_Part_Number=CLMVC-FKC-CGJJM569aBB7a343, Mouser Price/Stock=https://www.mouser.com/Search/Refine.aspx?Keyword=941-CLMVG569ABB7A343
P1: "Header, 2-Pin", LatestRevisionDate=17-Jul-2002, LatestRevisionNote="Re-released for DXP Platform.", Publisher="Altium Limited"
Q1: library part CMP-1058-00802-1, "Power MOSFET, -20 V, -1.37 A, Single P-Channel, 3-Pin SOT-323, Pb-Free, Tape and Reel", Manufacturer="On Semiconductor", Package Type="SC-70-3 / SOT-323-3", Channel Polarity="P Channel", Ciss Typ (pF)=603, ComponentLink1Description="Manufacturer URL", ComponentLink1URL=http://www.onsemi.com/, ComponentLink2Description=Datasheet, ComponentLink2URL=http://www.onsemi.cn/pub_link/Collateral/NTS4101P-D.PDF, ComponentLink3Description="Package Specification", ComponentLink3URL=http://www.onsemi.com/pub_link/Collateral/419-04.PDF, Configuration=Single, Coss Typ (pF)=90, Crss Typ (pF)=62, DatasheetVersion="Rev. 3", ID Max (A)=1.37, Mounting Technology="Surface Mount", PackageDescription="3-Pin Small Outline Transistor, Body 2 x 1.25 mm, Pitch 0.65 mm", PackageReference=SOT-323-3-419-04, PackageVersion="Rev. N, 11/2008", Packing="Tape and Reel", PartNumber=NTS4101PT1G, PD Max (W)=0.329, Qrr Typ (nC)=4.25, RoHS=Pb-Free, V(BR)DSS Min (V)=20, VGS(th) Max (V)=1.5, VGS Max (V)=8
Q2: library part CMP-1058-00765-1, "Power MOSFET, 200 mA, 50 V, N-Channel, 3-Pin SOT-23, Pb-Free, Tape and Reel", Manufacturer="On Semiconductor", Package Type=SOT-23-3, Channel Polarity="N Channel", Ciss Typ (pF)=40, ComponentLink1Description="Manufacturer URL", ComponentLink1URL=http://www.onsemi.com/, ComponentLink2Description=Datasheet, ComponentLink2URL=http://www.onsemi.com/pub_link/Collateral/BSS138LT1-D.PDF, ComponentLink3Description="Package Specification", ComponentLink3URL=http://www.onsemi.cn/pub_link/Collateral/318-08.PDF, Configuration=Single, Coss Typ (pF)=12, Crss Typ (pF)=3.5, DatasheetVersion="Rev. 8", ID Max (A)=0.2, Mounting Technology="Surface Mount", PackageDescription="3-Pin Small Outline Transistor, Body 2.92 x 1.3 mm, Pitch 0.95 mm", PackageReference=SOT-23-3-318-08, PackageVersion="Rev. AP, 11/2009", Packing="Tape and Reel", PartNumber=BSS138LT3G, PD Max (W)=0.225, RoHS=Pb-Free, V(BR)DSS Min (V)=50, VGS(th) Max (V)=1.5, VGS Max (V)=20
Q3: library part CMP-1048-00631-1, "General Purpose Transistor, NPN Silicon, 3-Pin SOT-23, Pb-Free, Tape and Reel", Manufacturer="On Semiconductor", ComponentLink1Description="Manufacturer URL", ComponentLink1URL=http://www.onsemi.com/, ComponentLink2Description=Datasheet, ComponentLink2URL=http://www.onsemi.cn/pub_link/Collateral/MMBT3904LT1-D.PDF, ComponentLink3Description="Package Specification", ComponentLink3URL=http://www.onsemi.cn/pub_link/Collateral/318-08.PDF, DatasheetVersion="Rev. 12", fT Min (MHz)=300, IC Continuous (A)=0.2, Mounting Technology="Surface Mount", PackageDescription="3-Pin Small Outline Transistor, Body 2.92 x 1.3 mm, Pitch 0.95 mm", PackageReference=SOT-23-3-318-08, PackageVersion="Rev. AP, 11/2009", Packing="Tape and Reel", PartNumber=MMBT3904LT1G, Polarity=NPN, RoHS=TRUE
R1 R2 R3 R28: library part ERJ-2GEJ102X, "RES SMD 1K OHM 5% 1/10W 0402", Digi-Key Part Number=P1.0KJCT-ND, Manufacturer="Panasonic Electronic Components", Operating Temperature="-55°C ~ 155°C", Package / Case="0402 (1005 Metric)", Power (Watts)="0.1W, 1/10W", Supplier Device Package=0402, Temperature Coefficient=±200ppm/°C, Tolerance=±5%, @ qty=1500, Composition="Thick Film", Datasheets=http://industrial.panasonic.com/www-cgi/jvcr13pz.cgi?E+PZ+3+AOA0001+ERJ2GEJ102X+7+WW, Factory Stock=0, Failure Rate=-, Features="Automotive AEC-Q200", Height - Seated (Max)="0.016\" (0.40mm)", Image=//media.digikey.com/Photos/Panasonic%20Photos/ERJ-PA2-Series.jpg, Minimum Quantity=1, Number of Terminations=2, Packaging="Cut Tape (CT)", Part Number=ERJ-2GEJ102X, Part Status=Active, Quantity Available=1939857, Series=ERJ, Size / Dimension="0.039\" L x 0.020\" W (1.00mm x 0.50mm)", Unit Price (USD)=0.00350
R14 R15 R16 R21: library part ERJ-2GEJ103X, "RES SMD 10K OHM 5% 1/10W 0402", Digi-Key Part Number=P10KJCT-ND, Manufacturer="Panasonic Electronic Components", Operating Temperature="-55°C ~ 155°C", Package / Case="0402 (1005 Metric)", Power (Watts)="0.1W, 1/10W", Supplier Device Package=0402, Temperature Coefficient=±200ppm/°C, Tolerance=±5%, @ qty=1500, Composition="Thick Film", Datasheets=http://industrial.panasonic.com/www-cgi/jvcr13pz.cgi?E+PZ+3+AOA0001+ERJ2GEJ103X+7+WW, Factory Stock=0, Failure Rate=-, Features="Automotive AEC-Q200", Height - Seated (Max)="0.016\" (0.40mm)", Image=//media.digikey.com/Photos/Panasonic%20Photos/ERJ-PA2-Series.jpg, Minimum Quantity=1, Number of Terminations=2, Packaging="Cut Tape (CT)", Part Number=ERJ-2GEJ103X, Part Status=Active, Quantity Available=2560215, Series=ERJ, Size / Dimension="0.039\" L x 0.020\" W (1.00mm x 0.50mm)", Unit Price (USD)=0.00350
R17: library part ERJ-2RKF1003X, "RES SMD 10K OHM 1% 1/10W 0402", Digi-Key Part Number=P100KLCT-ND, Manufacturer="Panasonic Electronic Components", Operating Temperature="-55°C ~ 155°C", Package / Case="0402 (1005 Metric)", Power (Watts)="0.1W, 1/10W", Supplier Device Package=0402, Temperature Coefficient=±100ppm/°C, Tolerance=±1%, @ qty=1500, Composition="Thick Film", Datasheets=http://industrial.panasonic.com/www-cgi/jvcr13pz.cgi?E+PZ+3+AOA0002+ERJ2RKF1003X+7+WW, Factory Stock=0, Failure Rate=-, Features="Automotive AEC-Q200", Height - Seated (Max)="0.016\" (0.40mm)", Image=//media.digikey.com/Photos/Panasonic%20Photos/ERJ-PA2-Series.jpg, Minimum Quantity=1, Number of Terminations=2, Packaging="Cut Tape (CT)", Part Number=ERJ-2RKF1003X, Part Status=Active, Quantity Available=2645965, Series=ERJ, Size / Dimension="0.039\" L x 0.020\" W (1.00mm x 0.50mm)", Unit Price (USD)=0.00496
R18: library part ERJ-2RKF8062X, "RES SMD 80.6K OHM 1% 1/10W 0402", Digi-Key Part Number=P80.6KLCT-ND, Manufacturer="Panasonic Electronic Components", Operating Temperature="-55°C ~ 155°C", Package / Case="0402 (1005 Metric)", Power (Watts)="0.1W, 1/10W", Supplier Device Package=0402, Temperature Coefficient=±100ppm/°C, Tolerance=±1%, @ qty=1500, Composition="Thick Film", Datasheets=http://industrial.panasonic.com/www-cgi/jvcr13pz.cgi?E+PZ+3+AOA0002+ERJ2RKF8062X+7+WW, Factory Stock=0, Failure Rate=-, Features="Automotive AEC-Q200", Height - Seated (Max)="0.016\" (0.40mm)", Image=//media.digikey.com/Photos/Panasonic%20Photos/ERJ-PA2-Series.jpg, Minimum Quantity=1, Number of Terminations=2, Packaging="Cut Tape (CT)", Part Number=ERJ-2RKF8062X, Part Status=Active, Quantity Available=91747, Series=ERJ, Size / Dimension="0.039\" L x 0.020\" W (1.00mm x 0.50mm)", Unit Price (USD)=0.00496
R19: library part ERJ-2GEJ203X, "RES SMD 20K OHM 5% 1/10W 0402", Digi-Key Part Number=P20KJCT-ND, Manufacturer="Panasonic Electronic Components", Operating Temperature="-55°C ~ 155°C", Package / Case="0402 (1005 Metric)", Power (Watts)="0.1W, 1/10W", Supplier Device Package=0402, Temperature Coefficient=±200ppm/°C, Tolerance=±5%, @ qty=1500, Composition="Thick Film", Datasheets=http://industrial.panasonic.com/www-cgi/jvcr13pz.cgi?E+PZ+3+AOA0001+ERJ2GEJ203X+7+WW, Factory Stock=0, Failure Rate=-, Features="Automotive AEC-Q200", Height - Seated (Max)="0.016\" (0.40mm)", Image=//media.digikey.com/Photos/Panasonic%20Photos/ERJ-PA2-Series.jpg, Minimum Quantity=1, Number of Terminations=2, Packaging="Cut Tape (CT)", Part Number=ERJ-2GEJ203X, Part Status=Active, Quantity Available=191642, Series=ERJ, Size / Dimension="0.039\" L x 0.020\" W (1.00mm x 0.50mm)", Unit Price (USD)=0.00350
R20: library part ERJ-2GEJ105X, "RES SMD 1M OHM 5% 1/10W 0402", Digi-Key Part Number=P1.0MJCT-ND, Manufacturer="Panasonic Electronic Components", Operating Temperature="-55°C ~ 155°C", Package / Case="0402 (1005 Metric)", Power (Watts)="0.1W, 1/10W", Supplier Device Package=0402, Temperature Coefficient=±200ppm/°C, Tolerance=±5%, @ qty=1500, Composition="Thick Film", Datasheets=http://industrial.panasonic.com/www-cgi/jvcr13pz.cgi?E+PZ+3+AOA0001+ERJ2GEJ105X+7+WW, Factory Stock=0, Failure Rate=-, Features="Automotive AEC-Q200", Height - Seated (Max)="0.016\" (0.40mm)", Image=//media.digikey.com/Photos/Panasonic%20Photos/ERJ-PA2-Series.jpg, Minimum Quantity=1, Number of Terminations=2, Packaging="Cut Tape (CT)", Part Number=ERJ-2GEJ105X, Part Status=Active, Quantity Available=1082572, Series=ERJ, Size / Dimension="0.039\" L x 0.020\" W (1.00mm x 0.50mm)", Unit Price (USD)=0.00350
R22: library part ERJ-2RKF3242X, "RES SMD 32.4K OHM 1% 1/10W 0402", Digi-Key Part Number=P32.4KLCT-ND, Manufacturer="Panasonic Electronic Components", Operating Temperature="-55°C ~ 155°C", Package / Case="0402 (1005 Metric)", Power (Watts)="0.1W, 1/10W", Supplier Device Package=0402, Temperature Coefficient=±100ppm/°C, Tolerance=±1%, @ qty=1500, Composition="Thick Film", Datasheets=http://industrial.panasonic.com/www-cgi/jvcr13pz.cgi?E+PZ+3+AOA0002+ERJ2RKF3242X+7+WW, Factory Stock=0, Failure Rate=-, Features="Automotive AEC-Q200", Height - Seated (Max)="0.016\" (0.40mm)", Image=//media.digikey.com/Photos/Panasonic%20Photos/ERJ-PA2-Series.jpg, Minimum Quantity=1, Number of Terminations=2, Packaging="Cut Tape (CT)", Part Number=ERJ-2RKF3242X, Part Status=Active, Quantity Available=89312, Series=ERJ, Size / Dimension="0.039\" L x 0.020\" W (1.00mm x 0.50mm)", Unit Price (USD)=0.00496
R23 R25: library part ERJ-2GEJ473X, "RES SMD 47K OHM 5% 1/10W 0402", Digi-Key Part Number=P47KJCT-ND, Manufacturer="Panasonic Electronic Components", Operating Temperature="-55°C ~ 155°C", Package / Case="0402 (1005 Metric)", Power (Watts)="0.1W, 1/10W", Supplier Device Package=0402, Temperature Coefficient=±200ppm/°C, Tolerance=±5%, @ qty=1500, Composition="Thick Film", Datasheets=http://industrial.panasonic.com/www-cgi/jvcr13pz.cgi?E+PZ+3+AOA0001+ERJ2GEJ473X+7+WW, Factory Stock=0, Failure Rate=-, Features="Automotive AEC-Q200", Height - Seated (Max)="0.016\" (0.40mm)", Image=//media.digikey.com/Photos/Panasonic%20Photos/ERJ-PA2-Series.jpg, Minimum Quantity=1, Number of Terminations=2, Packaging="Cut Tape (CT)", Part Number=ERJ-2GEJ473X, Part Status=Active, Quantity Available=5182645, Series=ERJ, Size / Dimension="0.039\" L x 0.020\" W (1.00mm x 0.50mm)", Unit Price (USD)=0.00350
R24: "Resistor", Manufacturer_Name=Bourns, Mouser Part Number=652-3361P-1-104GLF, Allied_Number=70153638, Allied Price/Stock=http://www.alliedelec.com/bourns-3361p-1-104glf/70153638/, Datasheet Link=http://www.farnell.com/datasheets/1846252.pdf, Manufacturer_Part_Number=3361P-1-104GLF, Mouser Price/Stock=https://www.mouser.com/Search/Refine.aspx?Keyword=652-3361P-1-104GLF
R26: library part ERJ-2GEJ104X, "RES SMD 100K OHM 5% 1/10W 0402", Digi-Key Part Number=P100KJCT-ND, Manufacturer="Panasonic Electronic Components", Operating Temperature="-55°C ~ 155°C", Package / Case="0402 (1005 Metric)", Power (Watts)="0.1W, 1/10W", Supplier Device Package=0402, Temperature Coefficient=±200ppm/°C, Tolerance=±5%, @ qty=1500, Composition="Thick Film", Datasheets=http://industrial.panasonic.com/www-cgi/jvcr13pz.cgi?E+PZ+3+AOA0001+ERJ2GEJ104X+7+WW, Factory Stock=0, Failure Rate=-, Features="Automotive AEC-Q200", Height - Seated (Max)="0.016\" (0.40mm)", Image=//media.digikey.com/Photos/Panasonic%20Photos/ERJ-PA2-Series.jpg, Minimum Quantity=1, Number of Terminations=2, Packaging="Cut Tape (CT)", Part Number=ERJ-2GEJ104X, Part Status=Active, Quantity Available=2387986, Series=ERJ, Size / Dimension="0.039\" L x 0.020\" W (1.00mm x 0.50mm)", Unit Price (USD)=0.00350
R27: library part ERJ-2GEJ332X, "RES SMD 3.3K OHM 5% 1/10W 0402", Digi-Key Part Number=P3.3KJCT-ND, Manufacturer="Panasonic Electronic Components", Operating Temperature="-55°C ~ 155°C", Package / Case="0402 (1005 Metric)", Power (Watts)="0.1W, 1/10W", Supplier Device Package=0402, Temperature Coefficient=±200ppm/°C, Tolerance=±5%, @ qty=1500, Composition="Thick Film", Datasheets=http://industrial.panasonic.com/www-cgi/jvcr13pz.cgi?E+PZ+3+AOA0001+ERJ2GEJ332X+7+WW, Factory Stock=0, Failure Rate=-, Features="Automotive AEC-Q200", Height - Seated (Max)="0.016\" (0.40mm)", Image=//media.digikey.com/Photos/Panasonic%20Photos/ERJ-PA2-Series.jpg, Minimum Quantity=1, Number of Terminations=2, Packaging="Cut Tape (CT)", Part Number=ERJ-2GEJ332X, Part Status=Active, Quantity Available=514266, Series=ERJ, Size / Dimension="0.039\" L x 0.020\" W (1.00mm x 0.50mm)", Unit Price (USD)=0.00350
R29 R30 R31 R32 R33 R34 R35 R36: library part ERJ-2GEJ151X, "RES SMD 150 OHM 5% 1/10W 0402", Digi-Key Part Number=P150JCT-ND, Manufacturer="Panasonic Electronic Components", Operating Temperature="-55°C ~ 155°C", Package / Case="0402 (1005 Metric)", Power (Watts)="0.1W, 1/10W", Supplier Device Package=0402, Temperature Coefficient=±200ppm/°C, Tolerance=±5%, @ qty=1500, Composition="Thick Film", Datasheets=http://industrial.panasonic.com/www-cgi/jvcr13pz.cgi?E+PZ+3+AOA0001+ERJ2GEJ151X+7+WW, Factory Stock=0, Failure Rate=-, Features="Automotive AEC-Q200", Height - Seated (Max)="0.016\" (0.40mm)", Image=//media.digikey.com/Photos/Panasonic%20Photos/ERJ-PA2-Series.jpg, Minimum Quantity=1, Number of Terminations=2, Packaging="Cut Tape (CT)", Part Number=ERJ-2GEJ151X, Part Status=Active, Quantity Available=303213, Series=ERJ, Size / Dimension="0.039\" L x 0.020\" W (1.00mm x 0.50mm)", Unit Price (USD)=0.00350
R37: library part ERJ-2GEJ101X, "RES SMD 100 OHM 5% 1/10W 0402", Digi-Key Part Number=P100JCT-ND, Manufacturer="Panasonic Electronic Components", Operating Temperature="-55°C ~ 155°C", Package / Case="0402 (1005 Metric)", Power (Watts)="0.1W, 1/10W", Supplier Device Package=0402, Temperature Coefficient=±200ppm/°C, Tolerance=±5%, @ qty=1500, Composition="Thick Film", Datasheets=http://industrial.panasonic.com/www-cgi/jvcr13pz.cgi?E+PZ+3+AOA0001+ERJ2GEJ101X+7+WW, Factory Stock=0, Failure Rate=-, Features="Automotive AEC-Q200", Height - Seated (Max)="0.016\" (0.40mm)", Image=//media.digikey.com/Photos/Panasonic%20Photos/ERJ-PA2-Series.jpg, Minimum Quantity=1, Number of Terminations=2, Packaging="Cut Tape (CT)", Part Number=ERJ-2GEJ101X, Part Status=Active, Quantity Available=3114113, Series=ERJ, Size / Dimension="0.039\" L x 0.020\" W (1.00mm x 0.50mm)", Unit Price (USD)=0.00350
R38 R39: library part ERJ-2GEJ220X, "RES SMD 22 OHM 5% 1/10W 0402", Digi-Key Part Number=P22JCT-ND, Manufacturer="Panasonic Electronic Components", Operating Temperature="-55°C ~ 155°C", Package / Case="0402 (1005 Metric)", Power (Watts)="0.1W, 1/10W", Supplier Device Package=0402, Temperature Coefficient=±200ppm/°C, Tolerance=±5%, @ qty=1500, Composition="Thick Film", Datasheets=http://industrial.panasonic.com/www-cgi/jvcr13pz.cgi?E+PZ+3+AOA0001+ERJ2GEJ220X+7+WW, Factory Stock=0, Failure Rate=-, Features="Automotive AEC-Q200", Height - Seated (Max)="0.016\" (0.40mm)", Image=//media.digikey.com/Photos/Panasonic%20Photos/ERJ-PA2-Series.jpg, Minimum Quantity=1, Number of Terminations=2, Packaging="Cut Tape (CT)", Part Number=ERJ-2GEJ220X, Part Status=Active, Quantity Available=1147502, Series=ERJ, Size / Dimension="0.039\" L x 0.020\" W (1.00mm x 0.50mm)", Unit Price (USD)=0.00350
S1: "Switch", Manufacturer_Name=Apem, Mouser Part Number=642-MHPS2285, Datasheet Link=https://media.digikey.com/pdf/Data%20Sheets/APEM%20Components%20PDFs/MHPS_Series.pdf, Height=13.5mm, Manufacturer_Part_Number=MHPS2285, Mouser Price/Stock=https://www.mouser.com/Search/Refine.aspx?Keyword=642-MHPS2285
U1: library part 74HC595, Package="VFQFN-16 STMicroelectronics", Availability=Unavailable, MF=STMicroelectronics, MP=74HC165, Price=None, SnapEDA_Link=https://www.snapeda.com/parts/74HC165/STMicroelectronics/view-part/?ref=snap
Y1: "Crystal or Oscillator", Manufacturer_Name=NDK, Mouser Part Number=344-NX3215SA32768K8, Datasheet Link=http://www.ndk.com/images/products/catalog/c_NX3215SA-STD-MUA-14_e.pdf, Manufacturer_Part_Number=NX3215SA-32.768K-STD-MUA-8, Mouser Price/Stock=https://www.mouser.com/Search/Refine.aspx?Keyword=344-NX3215SA32768K8
Y2: "Crystal or Oscillator", Manufacturer_Name="Murata Electronics", Mouser Part Number=81-XRCGB32M000F1H01R, Datasheet Link=https://www.murata.com/en-eu/products/productdetail?partno=XRCGB32M000F1H01R0, Height=0.7mm, Manufacturer_Part_Number=XRCGB32M000F1H01R0, Mouser Price/Stock=https://www.mouser.com/Search/Refine.aspx?Keyword=81-XRCGB32M000F1H01R

## Via types
v1: diameter 0.508, hole 0.254, Top Layer to Bottom Layer, 166 vias
v2: diameter 1.016, hole 0.508, Top Layer to Bottom Layer, 2 vias

## Nets (pads, with @x,y where several pads share a name; then routed paths per layer and width w, separated by ;. In a path a pad name is that pad's centre, name@x,y a point inside that pad or via, vN(x,y) a via of type N, cw(c..) or ccw(c..) an arc to the next point about the centre after c; other vN are vias at no path point)
5V: C17.1 IC3.4 J11.1 R18.2 | length 56.5
  Top Layer w0.305: J11.1@69.919,31.377 69.967,31.425 69.967,32.178 70.145,32.357 74,32.357 74.333,32.024 76.573,32.024 76.604,32.055 77.066,32.055 77.394,31.727 77.394,31.603 77.653,31.344 83.895,31.344 84.428,31.877 v1(85.725,31.877) ; v1(116.713,29.845) 117.038,30.17 117.277,30.17 ; IC3.4@117.874,33.102 IC3.4@118.022,32.954 ; IC3.4@118.384,32.954 IC3.4@118.022,32.954 ; C17.1@118.821,28.194 117.801,29.214 117.775,29.214 R18.2@117.653,29.337 117.588,29.402 117.588,29.859 117.277,30.17 ; 117.277,30.17 116.967,30.48 116.967,31.537 117.866,32.436 117.866,32.806 118.013,32.954 IC3.4@118.022,32.954
  Bottom Layer w0.305: v1(85.725,31.877) 85.979,31.877 86.161,31.695 86.456,31.695 86.635,31.516 86.635,31.496 86.687,31.496 86.891,31.293 86.944,31.293 87.93,31.293 88.526,30.697 88.87,30.353 100.079,30.353 100.399,30.033 111.608,30.033 111.673,30.099 116.459,30.099 v1(116.713,29.845)
ADS_IN0: IC5.4 J6.2 SB25.2 | length 16.1
  Top Layer w0.152: v1(49.403,32.639) 49.776,32.266 IC5.4@50.759,32.266 50.833,32.34 51.65,32.34 52.017,32.707 52.058,32.707 52.426,33.074 52.426,33.346 53.141,34.061 53.277,34.061 53.766,34.551 56.465,34.551 56.699,34.785 56.699,36.594 56.934,36.829 59.31,36.829 J6.2@60.452,35.687
  Bottom Layer w0.152: v1(49.403,32.639) 49.465,32.701 49.465,32.955 49.911,33.401 50.292,33.401
ADS_IN1: IC5.5 J6.3 SB26.2 | length 18.2